# EAGLE board MainBoardSchematic (EAGLE 7.2.0)
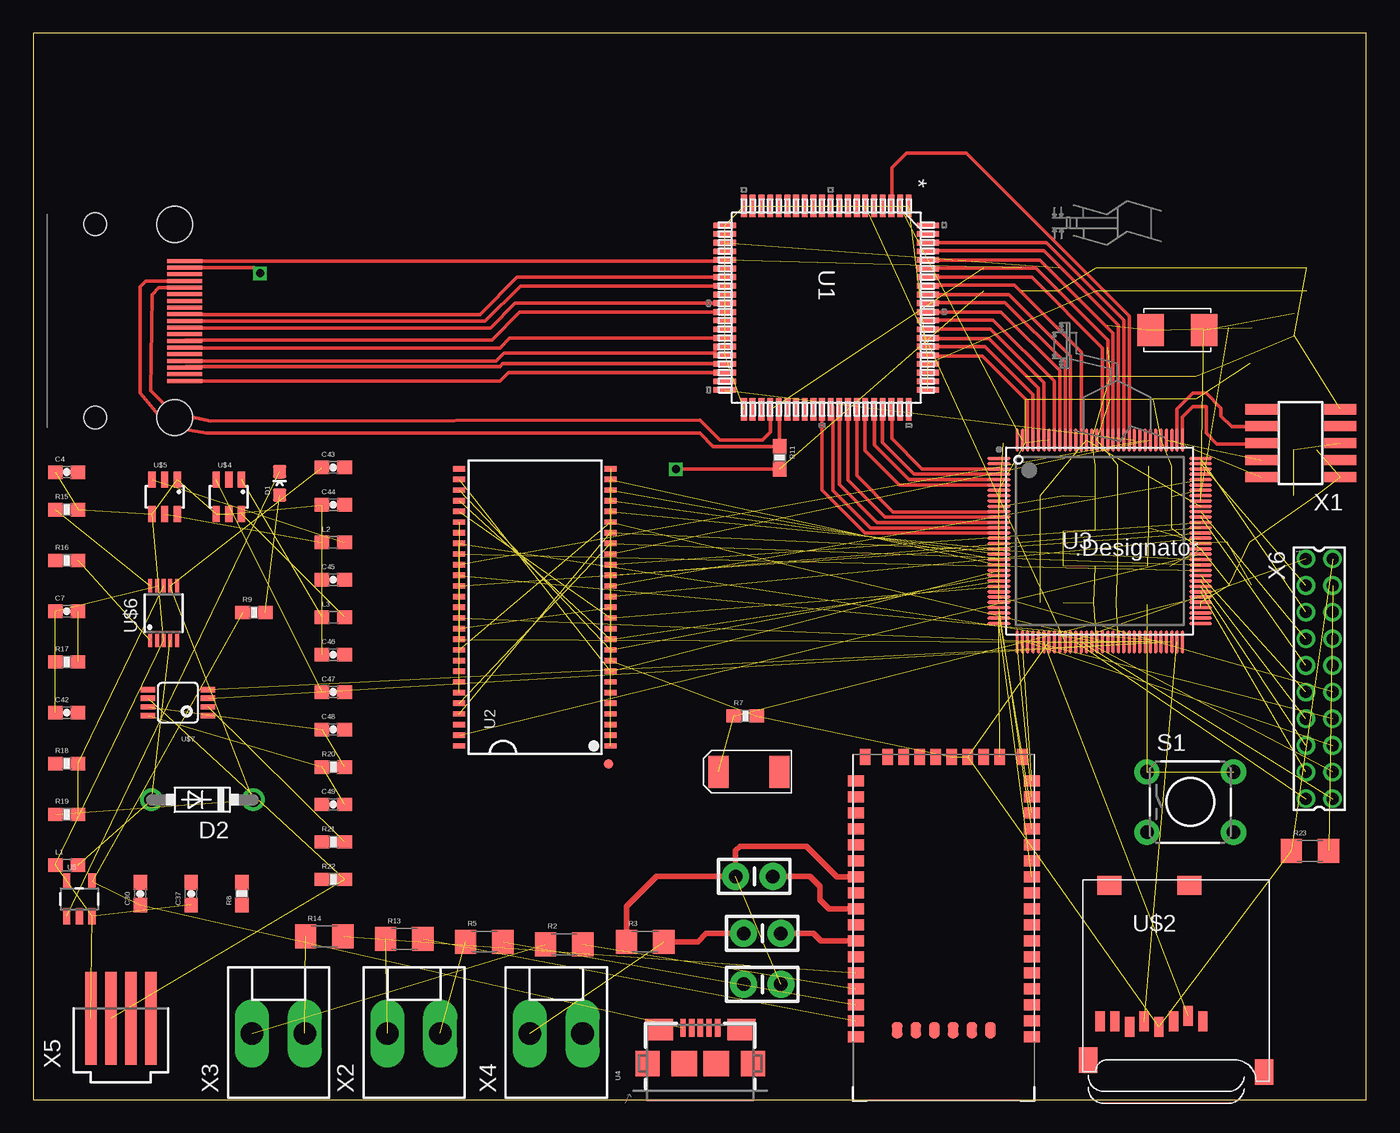
[diagram p0: board, top side]
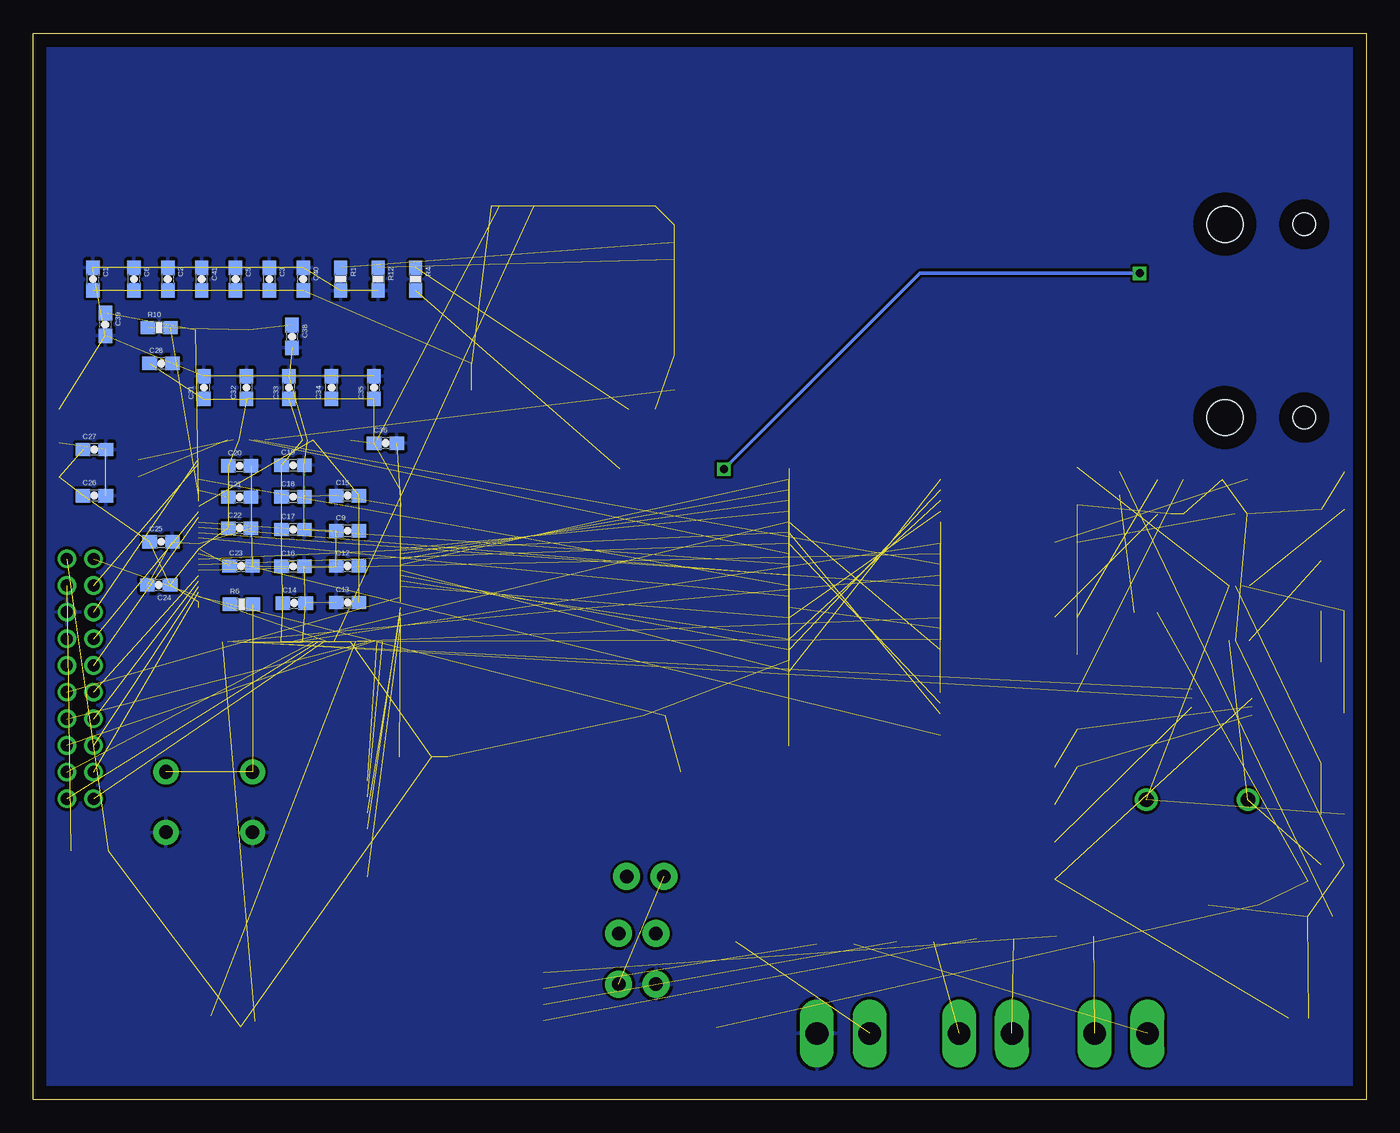
[diagram p1: board, bottom side, seen from below]

Size 100 x 80 mm. Coordinates in mm from the lower left corner, seen from the top.
Outline: 0,0 100,0 100,80 0,80 0,0
Copper layers (1*16): Top 0.035mm / dielectric 1.5mm / Bottom 0.035mm
Design rules "default": minimum track width 10mil, minimum drill 24mil, track to track 8mil, track to pad 8mil, pad to pad 8mil, via to via 8mil, smd to smd 8mil, copper to edge 40mil, drill to drill 8mil, minimum pad ring 10mil, minimum via ring 8mil, stop-mask expansion 4mil, vias tented up to drill 0mil, thermal gap 10mil

## Footprints (pad centres in the part's own frame; a part is rotated, then mirrored left to right if it is on the bottom)
0603-CAP = smd 1.1 x 1: 1 -0.85,0; 2 0.85,0
CAP-PTH-SMALL-KIT = drill 1.016 pad 2.032: 1 -1.397,0; 2 1.397,0
EIA6032 = smd 1.5 x 2.4: P$1 -2.3,0; P$2 2.3,0
LED-0603 = smd 1 x 1: A 0,-0.877; C 0,0.877
DO41-7.6 = drill 1.1 pad 1.7: A 3.81,0; C -3.81,0
0603 = smd 1.1 x 1: 1 -0.85,0; 2 0.85,0
0603-RES = smd 1.1 x 1: 1 -0.85,0; 2 0.85,0
1206 = smd 1.6 x 1.8: 1 -1.4,0; 2 1.4,0
TACTILE-PTH = drill 1.016 pad 1.88: 1 -3.251,2.261; 2 3.251,2.261; 3 -3.251,-2.261; 4 3.251,-2.261
ST_80_2 = smd 1.676 x 0.432: 1 -7.62,6.172; 2 -7.62,5.537; 3 -7.62,4.877; 4 -7.62,4.216; 5 -7.62,3.581; 6 -7.62,2.921; 7 -7.62,2.286; 8 -7.62,1.626; 9 -7.62,0.965; 10 -7.62,0.33; 11 -7.62,-0.33; 12 -7.62,-0.965; 13 -7.62,-1.626; 14 -7.62,-2.286; 15 -7.62,-2.921; 16 -7.62,-3.581; 17 -7.62,-4.216; 18 -7.62,-4.877; 19 -7.62,-5.537; 20 -7.62,-6.172; 41 7.62,-6.172; 42 7.62,-5.537; 43 7.62,-4.877; 44 7.62,-4.216; 45 7.62,-3.581; 46 7.62,-2.921; 47 7.62,-2.286; 48 7.62,-1.626; 49 7.62,-0.965; 50 7.62,-0.33; 51 7.62,0.33; 52 7.62,0.965; 53 7.62,1.626; 54 7.62,2.286; 55 7.62,2.921; 56 7.62,3.581; 57 7.62,4.216; 58 7.62,4.877; 59 7.62,5.537; 60 7.62,6.172 | smd 0.432 x 1.676: 21 -6.172,-7.62; 22 -5.537,-7.62; 23 -4.877,-7.62; 24 -4.216,-7.62; 25 -3.581,-7.62; 26 -2.921,-7.62; 27 -2.286,-7.62; 28 -1.626,-7.62; 29 -0.965,-7.62; 30 -0.33,-7.62; 31 0.33,-7.62; 32 0.965,-7.62; 33 1.626,-7.62; 34 2.286,-7.62; 35 2.921,-7.62; 36 3.581,-7.62; 37 4.216,-7.62; 38 4.877,-7.62; 39 5.537,-7.62; 40 6.172,-7.62; 61 6.172,7.62; 62 5.537,7.62; 63 4.877,7.62; 64 4.216,7.62; 65 3.581,7.62; 66 2.921,7.62; 67 2.286,7.62; 68 1.626,7.62; 69 0.965,7.62; 70 0.33,7.62; 71 -0.33,7.62; 72 -0.965,7.62; 73 -1.626,7.62; 74 -2.286,7.62; 75 -2.921,7.62; 76 -3.581,7.62; 77 -4.216,7.62; 78 -4.877,7.62; 79 -5.537,7.62; 80 -6.172,7.62
TSOP54-400 = smd 0.4 x 0.9: 1 -10.4,-5.68; 2 -9.6,-5.68; 3 -8.8,-5.68; 4 -8,-5.68; 5 -7.2,-5.68; 6 -6.4,-5.68; 7 -5.6,-5.68; 8 -4.8,-5.68; 9 -4,-5.68; 10 -3.2,-5.68; 11 -2.4,-5.68; 12 -1.6,-5.68; 13 -0.8,-5.68; 14 0,-5.68; 15 0.8,-5.68; 16 1.6,-5.68; 17 2.4,-5.68; 18 3.2,-5.68; 19 4,-5.68; 20 4.8,-5.68; 21 5.6,-5.68; 22 6.4,-5.68; 23 7.2,-5.68; 24 8,-5.68; 25 8.8,-5.68; 26 9.6,-5.68; 27 10.4,-5.68; 28 10.4,5.68; 29 9.6,5.68; 30 8.8,5.68; 31 8,5.68; 32 7.2,5.68; 33 6.4,5.68; 34 5.6,5.68; 35 4.8,5.68; 36 4,5.68; 37 3.2,5.68; 38 2.4,5.68; 39 1.6,5.68; 40 0.8,5.68; 41 0,5.68; 42 -0.8,5.68; 43 -1.6,5.68; 44 -2.4,5.68; 45 -3.2,5.68; 46 -4,5.68; 47 -4.8,5.68; 48 -5.6,5.68; 49 -6.4,5.68; 50 -7.2,5.68; 51 -8,5.68; 52 -8.8,5.68; 53 -9.6,5.68; 54 -10.4,5.68 | smd 0.7 x 0.7: P$1 -11.75,-5.5
PDT0128A_N = smd 1.753 x 0.229: 1 -7.569,6.198; 2 -7.569,5.791; 3 -7.569,5.41; 4 -7.569,5.004; 5 -7.569,4.597; 6 -7.569,4.191; 7 -7.569,3.81; 8 -7.569,3.404; 9 -7.569,2.997; 10 -7.569,2.591; 11 -7.569,2.21; 12 -7.569,1.803; 13 -7.569,1.397; 14 -7.569,0.991; 15 -7.569,0.61; 16 -7.569,0.203; 17 -7.569,-0.203; 18 -7.569,-0.61; 19 -7.569,-0.991; 20 -7.569,-1.397; 21 -7.569,-1.803; 22 -7.569,-2.21; 23 -7.569,-2.591; 24 -7.569,-2.997; 25 -7.569,-3.404; 26 -7.569,-3.81; 27 -7.569,-4.191; 28 -7.569,-4.597; 29 -7.569,-5.004; 30 -7.569,-5.41; 31 -7.569,-5.791; 32 -7.569,-6.198; 65 7.569,-6.198; 66 7.569,-5.791; 67 7.569,-5.41; 68 7.569,-5.004; 69 7.569,-4.597; 70 7.569,-4.191; 71 7.569,-3.81; 72 7.569,-3.404; 73 7.569,-2.997; 74 7.569,-2.591; 75 7.569,-2.21; 76 7.569,-1.803; 77 7.569,-1.397; 78 7.569,-0.991; 79 7.569,-0.61; 80 7.569,-0.203; 81 7.569,0.203; 82 7.569,0.61; 83 7.569,0.991; 84 7.569,1.397; 85 7.569,1.803; 86 7.569,2.21; 87 7.569,2.591; 88 7.569,2.997; 89 7.569,3.404; 90 7.569,3.81; 91 7.569,4.191; 92 7.569,4.597; 93 7.569,5.004; 94 7.569,5.41; 95 7.569,5.791; 96 7.569,6.198 | smd 0.229 x 1.753: 33 -6.198,-7.569; 34 -5.791,-7.569; 35 -5.41,-7.569; 36 -5.004,-7.569; 37 -4.597,-7.569; 38 -4.191,-7.569; 39 -3.81,-7.569; 40 -3.404,-7.569; 41 -2.997,-7.569; 42 -2.591,-7.569; 43 -2.21,-7.569; 44 -1.803,-7.569; 45 -1.397,-7.569; 46 -0.991,-7.569; 47 -0.61,-7.569; 48 -0.203,-7.569; 49 0.203,-7.569; 50 0.61,-7.569; 51 0.991,-7.569; 52 1.397,-7.569; 53 1.803,-7.569; 54 2.21,-7.569; 55 2.591,-7.569; 56 2.997,-7.569; 57 3.404,-7.569; 58 3.81,-7.569; 59 4.191,-7.569; 60 4.597,-7.569; 61 5.004,-7.569; 62 5.41,-7.569; 63 5.791,-7.569; 64 6.198,-7.569; 97 6.198,7.569; 98 5.791,7.569; 99 5.41,7.569; 100 5.004,7.569; 101 4.597,7.569; 102 4.191,7.569; 103 3.81,7.569; 104 3.404,7.569; 105 2.997,7.569; 106 2.591,7.569; 107 2.21,7.569; 108 1.803,7.569; 109 1.397,7.569; 110 0.991,7.569; 111 0.61,7.569; 112 0.203,7.569; 113 -0.203,7.569; 114 -0.61,7.569; 115 -0.991,7.569; 116 -1.397,7.569; 117 -1.803,7.569; 118 -2.21,7.569; 119 -2.591,7.569; 120 -2.997,7.569; 121 -3.404,7.569; 122 -3.81,7.569; 123 -4.191,7.569; 124 -4.597,7.569; 125 -5.004,7.569; 126 -5.41,7.569; 127 -5.791,7.569; 128 -6.198,7.569
USB-AB-MICRO-SMD = smd 1.35 x 0.4: D+ 2.675,0; D- 2.675,0.65; GND 2.675,-1.3; ID 2.675,-0.65; VBUS 2.675,1.3 | smd 1.6 x 2.1: P$1 2.55,3.1; P$2 2.55,-3.1 | smd 1.9 x 1.9: P$6 0,1.2; P$7 0,-1.2 | smd 1.9 x 1.801: P$8 0,3.95; P$9 0,-3.95
SOT23-5 = smd 0.55 x 1.2: 1 -0.95,-1.3; 2 0,-1.3; 3 0.95,-1.3; 4 0.95,1.3; 5 -0.95,1.3
RN-52 = smd 1.2 x 0.8: 1 -6.6,8.33; 2 -6.6,7.13; 3 -6.6,5.93; 4 -6.6,4.73; 5 -6.6,3.53; 6 -6.6,2.33; 7 -6.6,1.13; 8 -6.6,-0.07; 9 -6.6,-1.27; 10 -6.6,-2.47; 11 -6.6,-3.67; 12 -6.6,-4.87; 13 -6.6,-6.07; 14 -6.6,-7.27; 15 -6.6,-8.47; 16 -6.6,-9.67; 25 6.6,-9.67; 26 6.6,-8.47; 27 6.6,-7.27; 28 6.6,-6.07; 29 6.6,-4.87; 30 6.6,-3.67; 31 6.6,-2.47; 32 6.6,-1.27; 33 6.6,-0.07; 34 6.6,1.13; 35 6.6,2.33; 36 6.6,3.53; 37 6.6,4.73; 38 6.6,5.93; 39 6.6,7.13; 40 6.6,8.33; G1 -6.6,9.53; G4 6.6,9.53 | smd 0.8 x 1.2: 17 -4.2,-11.47; 18 -3,-11.47; 19 -1.8,-11.47; 20 -0.6,-11.47; 21 0.6,-11.47; 22 1.8,-11.47; 23 3,-11.47; 24 4.2,-11.47; G2 -5.9,-11.47; G3 5.9,-11.46; RFG1 -3.5,9.03; RFG2 -2.1,9.03; RFG3 -0.7,9.03; RFG4 0.7,9.03; RFG5 2.1,9.03; RFG6 3.5,9.03
MICROSD = smd 0.7 x 1.5: 1 9,-10.64; 2 7.9,-10.24; 3 6.8,-10.64; 4 5.7,-11.04; 5 4.6,-10.64; 6 3.5,-11.04; 7 2.4,-10.64; 8 1.3,-10.64 | smd 1.8 x 1.4: CD1 2,-0.44; CD2 8,-0.44 | smd 1.4 x 1.9: MT1 0.4,-13.54; MT2 13.6,-14.44
HDMI_A_SMD = smd 0.3 x 2.6: P$1 4.5,3.74; P$2 4,3.74; P$3 3.5,3.74; P$4 3,3.74; P$5 2.5,3.74; P$6 2,3.74; P$7 1.5,3.74; P$8 1,3.74; P$9 0.5,3.74; P$10 0,3.74; P$11 -0.5,3.74; P$12 -1,3.74; P$13 -1.5,3.74; P$14 -2,3.74; P$15 -2.5,3.74; P$16 -3,3.74; P$17 -3.5,3.74; P$18 -4,3.74; P$19 -4.5,3.74 | hole 2.7: -7.25,2.98; 7.25,2.98 | hole 1.7: -7.25,-2.98; 7.25,-2.98
SOT23-6 = smd 0.55 x 1.2: 1 0.95,1.3; 2 0,1.3; 3 -0.95,1.3; 4 -0.95,-1.3; 5 0,-1.3; 6 0.95,-1.3
MSOP10 = smd 0.3 x 1: 1 -1,-2.05; 2 -0.5,-2.05; 3 0,-2.05; 4 0.5,-2.05; 5 1,-2.05; 6 1,2.05; 7 0.5,2.05; 8 0,2.05; 9 -0.5,2.05; 10 -1,2.05
MSOP8 = smd 0.4 x 1.1: 1 -0.975,-2.25; 2 -0.325,-2.25; 3 0.325,-2.25; 4 0.975,-2.25; 5 0.975,2.25; 6 0.325,2.25; 7 -0.325,2.25; 8 -0.975,2.25
1365-10 = smd 0.76 x 2.4: 1 -2.54,-2.95; 2 -2.54,2.95; 3 -1.27,-2.95; 4 -1.27,2.95; 5 0,-2.95; 6 0,2.95; 7 1.27,-2.95; 8 1.27,2.95; 9 2.54,-2.95; 10 2.54,2.95
KK-156-2 = drill 1.7 pad 2.184 long: 1 -1.98,0; 2 1.98,0
87438-04 = smd 7 x 0.85: 1 0,2.25; 2 0,0.75; 3 0,-0.75; 4 0,-2.25
87758-2016 = drill 0.9 pad 1.27: 1 -9,-1; 2 -9,1; 3 -7,-1; 4 -7,1; 5 -5,-1; 6 -5,1; 7 -3,-1; 8 -3,1; 9 -1,-1; 10 -1,1; 11 1,-1; 12 1,1; 13 3,-1; 14 3,1; 15 5,-1; 16 5,1; 17 7,-1; 18 7,1; 19 9,-1; 20 9,1
NX5032GA = smd 2 x 2.4: P$1 -2,0; P$2 2,0

## Placement (x,y rotation side)
C1  .1uF  [0603-CAP]  95.53,61.56 270 bottom
C2  .1uF  [0603-CAP]  89.91,61.56 270 bottom
C3  .1uF  [0603-CAP]  82.29,61.56 270 bottom
C4  4.7uF  [0603-CAP]  2.51,47.07 0 top
C5  .1uF  [0603-CAP]  84.83,61.56 270 bottom
C6  .1uF  [0603-CAP]  92.45,61.56 270 bottom
C7  470pF  [0603-CAP]  2.51,36.64 0 top
C8  [CAP-PTH-SMALL-KIT]  54.09,16.74 0 top
C9  0.01 uF  [0603-CAP]  76.42,42.67 0 bottom
C10  [CAP-PTH-SMALL-KIT]  54.69,12.46 0 top
C11  [CAP-PTH-SMALL-KIT]  54.69,8.65 0 top
C12  0.1 uF  [0603-CAP]  76.42,40.03 0 bottom
C13  1 uF  [0603-CAP]  76.42,37.29 0 bottom
C14  0.1uF  [0603-CAP]  80.42,37.25 0 bottom
C15  2.2 uF  [0603-CAP]  76.42,45.31 0 bottom
C16  0.1uF  [0603-CAP]  80.52,40.01 0 bottom
C17  0.01uF  [0603-CAP]  80.52,42.77 0 bottom
C18  0.01uF  [0603-CAP]  80.52,45.23 0 bottom
C19  0.1uF  [0603-CAP]  80.52,47.59 0 bottom
C20  0.1uF  [0603-CAP]  84.52,47.55 0 bottom
C21  0.1uF  [0603-CAP]  84.52,45.21 0 bottom
C22  0.1uF  [0603-CAP]  84.52,42.87 0 bottom
C23  0.1uF  [0603-CAP]  84.42,40.03 0 bottom
C24  0.1uF  [0603-CAP]  90.58,38.61 180 bottom
C25  0.1uF  [0603-CAP]  90.42,41.85 0 bottom
C26  0.1uF  [0603-CAP]  95.42,45.31 0 bottom
C27  0.01uF  [0603-CAP]  95.42,48.77 0 bottom
C28  0.1uF  [0603-CAP]  90.42,55.23 0 bottom
C29  10nF  [EIA6032]  53.69,24.59 0 top
C30  4.7uF  [0603-CAP]  8.03,15.45 90 top
C31  2.2 uF  [0603-CAP]  87.2,53.42 90 bottom
C32  2.2 uF  [0603-CAP]  84.01,53.42 90 bottom
C33  2.2 uF  [0603-CAP]  80.82,53.42 90 bottom
C34  2.2 uF  [0603-CAP]  77.63,53.42 90 bottom
C35  2.2 uF  [0603-CAP]  74.44,53.42 90 bottom
C36  2.2 uF  [0603-CAP]  73.58,49.25 0 bottom
C37  4.7uF  [0603-CAP]  11.84,15.45 90 top
C38  12pF  [0603-CAP]  80.59,57.26 270 bottom
C39  12pF  [0603-CAP]  94.6,58.16 270 bottom
C40  .1uF  [0603-CAP]  79.75,61.56 270 bottom
C41  .1uF  [0603-CAP]  87.37,61.56 270 bottom
C42  4.7pF  [0603-CAP]  2.51,29.02 0 top
C43  22uF  [0603-CAP]  22.51,47.43 0 top
C44  4.7uF  [0603-CAP]  22.51,44.62 0 top
C45  4.7uF  [0603-CAP]  22.51,39 0 top
C46  2.2uF  [0603-CAP]  22.51,33.38 0 top
C47  10uF  [0603-CAP]  22.51,30.57 0 top
C48  1uF  [0603-CAP]  22.51,27.76 0 top
C49  220nF  [0603-CAP]  22.51,22.14 0 top
D1  RED  [LED-0603]  18.48,46.23 0 top
D2  1N5817-T  [DO41-7.6]  12.68,22.49 180 top
L1  10uH  [0603]  2.51,17.59 0 top
L2  4.7uH  [0603]  22.51,41.81 0 top
L3  10uH  [0603]  22.51,36.19 0 top
R1  887  [0603-RES]  76.94,61.56 270 bottom
R2  8  [1206]  39.83,11.66 0 top
R3  2.2K  [1206]  45.9,11.85 0 top
R4  2k  [0603-RES]  71.32,61.56 270 bottom
R5  8  [1206]  33.83,11.85 0 top
R6  470  [0603-RES]  84.38,37.16 0 bottom
R7  10k  [0603-RES]  53.42,28.78 0 top
R8  10k  [0603-RES]  15.65,15.45 90 top
R9  10k  [0603-RES]  16.56,36.54 0 top
R10  750  [0603-RES]  90.56,57.92 0 bottom
R11  2k  [0603-RES]  55.99,48.16 270 top
R12  10k  [0603-RES]  74.13,61.56 270 bottom
R13  8  [1206]  27.83,12.04 0 top
R14  8  [1206]  21.83,12.23 0 top
R15  1M  [0603-RES]  2.51,44.26 0 top
R16  30k  [0603-RES]  2.51,40.45 0 top
R17  82k  [0603-RES]  2.51,32.83 0 top
R18  549k  [0603-RES]  2.51,25.21 0 top
R19  1.65M  [0603-RES]  2.51,21.4 0 top
R20  1k  [0603-RES]  22.51,24.95 0 top
R21  200k  [0603-RES]  22.51,19.33 0 top
R22  33m  [0603-RES]  22.51,16.52 0 top
R23  8  [1206]  95.78,18.64 0 top
S1  [TACTILE-PTH]  86.8,22.32 0 top
U1  AD9389BBSTZ-165  [ST_80_2]  59.5,59.42 270 top
U2  [TSOP54-400]  37.64,36.93 90 top
U3  Value  [PDT0128A_N]  80.01,41.91 0 top
U4  [USB-AB-MICRO-SMD]  50.04,2.71 90 top
U5  MCP73831  [SOT23-5]  3.45,15.05 0 top
U$1  BLUETOOTH-RN-52  [RN-52]  68.31,14.24 180 top
U$2  MICROSD  [MICROSD]  78.74,16.51 0 top
U$3  HDMI_A  [HDMI_A_SMD]  7.62,58.42 270 top
U$4  LTC3531  [SOT23-6]  14.67,45.23 0 top
U$5  LTC3405A  [SOT23-6]  9.86,45.23 0 top
U$6  LTC3401  [MSOP10]  9.78,36.5 0 top
U$7  STC3100  [MSOP8]  10.85,29.78 90 top
X1  1365-10  [1365-10]  95.09,49.25 90 top
X2  [KK-156-2]  28.55,4.96 0 top
X3  [KK-156-2]  18.39,4.96 0 top
X4  [KK-156-2]  39.23,4.96 0 top
X5  87438-04  [87438-04]  6.57,6.1 90 top
X6  87758-2016  [87758-2016]  96.48,31.57 270 top
Y1  [NX5032GA]  85.83,57.73 0 top

## Library data of the parts
C1-C7 C9 C12-C49 L1-L3 R1-R23 = SparkFun-Passives
C8 C10 C11 = SparkFun-Capacitors; PROD_ID: CAP-08370
D1 = HelmetHUD; PROD_ID: DIO-00819
D2 = diode
S1 = SparkFun-Retired
U1 U2 U4 U$1-U$7 Y1 = HelmetHUD
U3 = HelmetHUD; ALTERNATEPARTNUMBER: TM4C129ENCPDTI3; APPLICATION_BUILDNUMBER: *; COMPTYPE: IC; MANUFACTURER: Texas Instruments; MOUNTTYPE: SMT; PACKAGEREFERENCE: PDT0128A; PARTNUMBER: TM4C129ENCPDTI3R; PIN_COUNT: 128; REFDES: RefDes; ROHS: Y; TYPE: TYPE
U5 = SparkFun-PowerIC; PROD_ID: IC-09995
X1 = HelmetHUD; OC_FARNELL: unknown; OC_NEWARK: unknown
X2-X5 = con-molex; OC_FARNELL: unknown; OC_NEWARK: unknown
X6 = HelmetHUD; MPN: 87758-2016; OC_FARNELL: 7472374; OC_NEWARK: 25M5677

## Nets
1.8V: C1.2 C2.2 C3.2 C5.2 C6.2 C40.2 C41.2 U1.1 U1.16 U1.19 U1.20 U1.21 U1.24 U1.29 U1.36 U1.41 U1.61 U1.62 U1.63 U1.64
3.3V: C14.1 C16.1 C17.1 C18.1 C19.1 C20.1 C21.1 C22.1 C23.1 C24.1 C25.1 C26.1 C27.1 C28.1 C31.1 C32.1 C33.1 C34.1 C35.1 C36.1 R7.2 R23.1 U2.1 U2.3 U2.9 U2.14 U2.27 U2.43 U2.49 U3.7 U3.8 U3.9 U3.16 U3.26 U3.28 U3.39 U3.47 U3.51 U3.52 U3.68 U3.69 U3.79 U3.90 U3.101 U3.113 U3.122 U$1.19 U$1.20 U$2.4 X1.1 X6.2
5V: R4.2 R11.2 U$3.P$18
BT_GPIO7: U3.31 U$1.17
BT_GPIO9: U3.32 U$1.10
BT_UART_CTS: U3.30 U$1.14
BT_UART_RTS: U3.29 U$1.13
BT_UART_RX: U3.34 U$1.16
BT_UART_TX: U3.33 U$1.15
CAM_CLK: U3.43 X6.1
CAM_D0: U3.73 X6.13
CAM_D1: U3.72 X6.15
CAM_D2: U3.71 X6.17
CAM_D3: U3.44 X6.19
CAM_D4: U3.45 X6.20
CAM_D5: U3.46 X6.18
CAM_D6: U3.35 X6.16
CAM_D7: U3.36 X6.14
CAM_HSYNC: U3.85 X6.9
CAM_PCLK: U3.74 X6.11
CAM_PWDWN: U3.27 X6.12
CAM_SCL: U3.95 X6.3
CAM_SDA: U3.96 X6.5
CAM_VSYNC: U3.86 X6.7
DDCSCL: R4.1 U1.44 U$3.P$15
DDCSDA: R11.1 U1.45 U$3.P$16
GAUGE_SCL: U3.61 U$7.4
GAUGE_SDA: U3.60 U$7.3
GND: C1.1 C2.1 C3.1 C4.2 C5.1 C6.1 C9.1 C11.1 C12.1 C13.1 C14.2 C15.1 C16.2 C17.2 C18.2 C19.2 C20.2 C21.2 C22.2 C23.2 C24.2 C25.2 C26.2 C27.2 C28.2 C29.P$2 C30.2 C31.2 C32.2 C33.2 C34.2 C35.2 C36.2 C37.2 C38.2 C39.2 C40.1 C41.1 C42.2 C43.2 C44.2 C45.2 C46.2 C47.2 C48.2 C49.1 R1.2 R8.1 R12.2 R16.1 R17.1 R18.1 R21.1 R22.1 S1.3 S1.4 U1.7 U1.8 U1.9 U1.10 U1.11 U1.12 U1.13 U1.14 U1.15 U1.17 U1.18 U1.22 U1.26 U1.32 U1.39 U1.42 U1.43 U1.59 U1.60 U1.79 U1.80 U2.6 U2.12 U2.28 U2.41 U2.46 U2.52 U2.54 U3.10 U3.17 U3.48 U3.55 U3.58 U3.80 U3.114 U4.GND U5.2 U$1.36 U$1.G1 U$1.G2 U$1.G3 U$1.G4 U$1.RFG1 U$1.RFG2 U$1.RFG3 U$1.RFG4 U$1.RFG5 U$1.RFG6 U$2.6 U$2.MT1 U$2.MT2 U$3.P$2 U$3.P$5 U$3.P$8 U$3.P$12 U$3.P$17 U$4.2 U$5.2 U$5.6 U$6.5 U$7.5 X1.3 X1.5 X1.9 X4.2 X6.6
HDMI_CLK: U1.6 U3.42
HDMI_D0: U1.2 U3.127
HDMI_D1: U1.78 U3.108
HDMI_D2: U1.77 U3.109
HDMI_D3: U1.76 U3.110
HDMI_D4: U1.75 U3.111
HDMI_D5: U1.74 U3.112
HDMI_D6: U1.73 U3.116
HDMI_D7: U1.72 U3.118
HDMI_D8: U1.71 U3.119
HDMI_D9: U1.70 U3.120
HDMI_D10: U1.69 U3.121
HDMI_D11: U1.68 U3.123
HDMI_D12: U1.67 U3.124
HDMI_D13: U1.66 U3.125
HDMI_D14: U1.65 U3.126
HDMI_D15: U1.58 U3.3
HDMI_D16: U1.57 U3.4
HDMI_D17: U1.56 U3.5
HDMI_D18: U1.55 U3.6
HDMI_D19: U1.54 U3.11
HDMI_D20: U1.53 U3.12
HDMI_D21: U1.52 U3.13
HDMI_D22: U1.51 U3.14
HDMI_D23: U1.50 U3.15
HDMI_DE: U1.3 U3.107
HDMI_HSYNC: U3.128
HDMI_INT: U1.40 U3.106
HDMI_VSYNC: U3.1
N$1: R12.1 U1.25 U$3.P$19
N$2: R1.1 U1.23
N$3: U1.34 U$3.P$6
N$4: U1.30 U$3.P$9
N$5: U1.31 U$3.P$7
N$6: U1.35 U$3.P$4
N$7: U1.37 U$3.P$3
N$8: C8.2 U$1.33
N$9: U1.38 U$3.P$1
N$10: U1.28 U$3.P$10
N$11: C10.2 U$1.35
N$12: C8.1 C11.2 R3.1 U$1.31
N$13: C10.1 R3.2 X4.1
N$14: R6.2 S1.1 S1.2
N$15: R13.2 U$1.40
N$16: R5.2 U$1.39
N$17: R2.2 U$1.38
N$18: R14.2 U$1.37
N$19: R23.2 X6.4
N$20: U1.27 U$3.P$11
N$21: C30.1 R9.1 U4.VBUS U5.4
N$22: C4.1 C37.1 C44.1 C46.1 L1.1 R15.2 U5.3 U$4.4 U$4.5 U$5.1 U$5.4 U$6.3 X5.1
N$23: C9.2 C12.2 C13.2 C15.2 U3.87 U3.115
N$24: C29.P$1 R6.1 R7.1 U3.70
N$25: C38.1 R10.1 Y1.P$1
N$26: U5.5
N$27: C39.1 U3.88 Y1.P$2
N$28: R8.2
N$29: R10.2 U3.89
N$30: R14.1 X3.2
N$31: R2.1 X3.1
N$32: R5.1 X2.2
N$33: R13.1 X2.1
N$34: D1.A R9.2
N$35: D1.C U5.1
N$36: R15.1 U$6.10
N$37: R16.2 U$6.1
N$38: C7.1 C42.1 U$6.9
N$39: C7.2 R17.2
N$40: R18.2 R19.2 U$6.8
N$41: C43.1 D2.C R19.1 U$6.7
N$42: D2.A L1.2 U$6.4
N$43: C45.1 L2.1 U$5.5
N$44: L2.2 U$5.3
N$45: L3.2 U$4.6
N$46: L3.1 U$4.1
N$47: C47.1 U$4.3
N$48: C48.1 R20.2 U$7.7
N$49: C49.2 R20.1 U$7.8
N$50: R21.2 U$7.2
N$51: R22.2 U$7.6 X5.2
N$52: U3.63 U$2.5
N$65: X6.8
N$66: X6.10
SD_CS: U3.38 U$2.2
SD_DIN: U$2.3
SD_IN: U3.37
SDRAM_0: U2.2 U2.23 U3.18
SDRAM_1: U2.4 U2.24 U3.19
SDRAM_2: U2.5 U2.25 U3.20
SDRAM_3: U2.7 U2.26 U3.21
SDRAM_4: U2.8 U2.29 U3.22
SDRAM_5: U2.10 U2.30 U3.23
SDRAM_6: U2.11 U2.31 U3.24
SDRAM_7: U2.13 U2.32 U3.25
SDRAM_8: U2.33 U2.42 U3.40
SDRAM_9: U2.34 U2.44 U3.41
SDRAM_10: U2.22 U2.45 U3.50
SDRAM_11: U2.35 U2.47 U3.49
SDRAM_12: U2.36 U2.48 U3.75
SDRAM_13: U2.20 U2.50 U3.76
SDRAM_14: U2.21 U2.51 U3.77
SDRAM_15: U2.53 U3.78
SDRAM_CAS: U2.17 U3.83
SDRAM_CKE: U2.37 U3.104
SDRAM_CLK: U2.38 U3.62
SDRAM_CS: U2.19 U3.103
SDRAM_LDQM: U2.15 U3.81
SDRAM_RAS: U2.18 U3.84
SDRAM_UDQM: U2.39 U3.82
SDRAM_WE: U2.16 U3.92
SWCLK: U3.100 X1.4
TDI: U3.98 X1.8
TDO_SWO: U3.97 X1.6
TMS_SWDIO: U3.99 X1.2

## Tracks (layer width: path | path; a pad name or v marks a point on that pad's centre or on a via)
1.8V  (19 unrouted)
3.3V  (50 unrouted)
5V  (via drill 0.6)  (1 unrouted)
  Top 0.254: U$3.P$18 16.58,62.42 v17,62 | v48.2,47.3 R11.2
  Bottom 0.254: v17,62 33.5,62 v48.2,47.3
BT_GPIO7  (1 unrouted)
BT_GPIO9  (1 unrouted)
BT_UART_CTS  (1 unrouted)
BT_UART_RTS  (1 unrouted)
BT_UART_RX  (1 unrouted)
BT_UART_TX  (1 unrouted)
CAM_CLK  (1 unrouted)
CAM_D0  (1 unrouted)
CAM_D1  (1 unrouted)
CAM_D2  (1 unrouted)
CAM_D3  (1 unrouted)
CAM_D4  (1 unrouted)
CAM_D5  (1 unrouted)
CAM_D6  (1 unrouted)
CAM_D7  (1 unrouted)
CAM_HSYNC  (1 unrouted)
CAM_PCLK  (1 unrouted)
CAM_PWDWN  (1 unrouted)
CAM_SCL  (1 unrouted)
CAM_SDA  (1 unrouted)
CAM_VSYNC  (1 unrouted)
DDCSCL  (1 unrouted)
  Top 0.254: U$3.P$15 9.42,60.92 8.9,60.4 8.8,53.2 10.5,51.5 13.3,50.9 50,51 51.5,49.5 54.7,49.5 55.3,50.1 55.3,51.78 U1.44
DDCSDA
  Top 0.254: U$3.P$16 8.42,61.42 8,61 8,53 10.1,50.5 13,50 50,50 51,49 56.08,49 R11.1 55.99,51.73 U1.45 | U1.45 | 56.09,51.63 U1.45
GAUGE_SCL  (1 unrouted)
GAUGE_SDA  (1 unrouted)
GND  (42 unrouted)
  pour Bottom: 0,0 0,80 100,80 100,0
HDMI_CLK  (1 unrouted)
HDMI_D0  (1 unrouted)
HDMI_D1
  Top 0.254: U3.108 81.81,58.49 76,64.3 U1.78
HDMI_D2
  Top 0.254: U3.109 81.41,58.09 75.8,63.7 67.18,63.7 U1.77
HDMI_D3
  Top 0.254: U3.110 81,57.5 75.5,63 U1.76
HDMI_D4
  Top 0.254: U3.111 80.62,56.98 75.2,62.4 67.18,62.4 U1.75
HDMI_D5
  Top 0.254: U3.112 80.21,56.39 74.9,61.7 U1.74
HDMI_D6
  Top 0.254: U3.116 78.61,56.09 73.6,61.1 67.17,61.1 U1.73
HDMI_D7
  Top 0.254: U3.118 77.8,55.8 73.2,60.4 67.14,60.4 U1.72
HDMI_D8
  Top 0.254: U3.119 77.42,55.28 72.9,59.8 67.17,59.8 U1.71
HDMI_D9
  Top 0.254: U3.120 77.01,54.69 72.6,59.1 U1.70
HDMI_D10
  Top 0.254: U3.121 76.61,53.89 72,58.5 67.17,58.5 U1.69
HDMI_D11
  Top 0.254: U3.123 75.82,53.78 71.8,57.8 U1.68
HDMI_D12
  Top 0.254: U3.124 75.41,53.39 71.7,57.1 67.15,57.1 U1.67
HDMI_D13
  Top 0.254: U3.125 75.01,52.89 71.4,56.5 U1.66
HDMI_D14
  Top 0.254: U3.126 74.6,52.4 71.2,55.8 67.16,55.8 U1.65
HDMI_D15
  Top 0.254: U3.3 66.68,47.32 64.4,49.6 64.4,51.78 U1.58
HDMI_D16
  Top 0.254: U3.4 66.09,46.91 63.7,49.3 63.7,51.78 U1.57
HDMI_D17
  Top 0.254: U3.5 65.69,46.51 63.1,49.1 63.1,51.78 U1.56
HDMI_D18
  Top 0.254: U3.6 65,46.1 62.4,48.7 62.4,51.78 U1.55
HDMI_D19
  Top 0.254: U1.54 61.79,46.81 64.5,44.1 72.42,44.1 U3.11
HDMI_D20
  Top 0.254: U1.53 61.13,46.47 63.9,43.7 72.43,43.7 U3.12
HDMI_D21
  Top 0.254: U1.52 60.47,46.13 63.3,43.3 U3.13
HDMI_D22
  Top 0.254: U1.51 59.83,51.83 60,52 60,45.7 62.8,42.9 U3.14
HDMI_D23
  Top 0.254: U1.50 59.17,45.73 62.4,42.5 72.42,42.5 U3.15
HDMI_DE
  Top 0.254: U3.107 82.22,58.78 70,71 65.5,71 64.4,69.9 64.4,67.06 U1.3
HDMI_INT  (1 unrouted)
N$1  (1 unrouted)
  Top 0.254: U$3.P$19 51.8,62.92 U1.25
N$2  (1 unrouted)
N$3
  Top 0.254: U1.34 35.73,57.13 35,56.4 11.38,56.4 U$3.P$6
N$4
  Top 0.254: U1.30 36.15,59.75 34.3,57.9 11.38,57.9 U$3.P$9
N$5
  Top 0.254: U1.31 36.49,59.09 34.4,57 11.44,57 U$3.P$7
N$6
  Top 0.254: U1.35 51.5,56.5 51,56 35.3,56 34.7,55.4 11.38,55.4 U$3.P$4
N$7
  Top 0.254: U1.37 35.2,55.2 35,55 11.44,55 U$3.P$3
N$8
  Top 0.406: C8.2 58.26,16.74 59,16 59,15 59.69,14.31 U$1.33
N$9
  Top 0.254: U1.38 35.64,54.54 35,53.9 11.38,53.9 U$3.P$1
N$10
  Top 0.254: U1.28 36.55,61.05 33.9,58.4 11.38,58.4 U$3.P$10
N$11
  Top 0.406: C10.2 58.54,12.46 59.09,11.91 U$1.35
N$12  (1 unrouted)
  Top 0.406: U$1.31 60.29,16.71 58,19 53,19 52.69,18.69 C8.1 46.74,16.74 44.5,14.5 R3.1
N$13  (1 unrouted)
  Top 0.406: C10.1 50.46,12.46 49.85,11.85 R3.2
N$14  (2 unrouted)
N$15  (1 unrouted)
N$16  (1 unrouted)
N$17  (1 unrouted)
N$18  (1 unrouted)
N$19  (1 unrouted)
N$20
  Top 0.254: U1.27 36.31,61.71 33.5,58.9 11.38,58.9 U$3.P$11
N$21  (3 unrouted)
N$22  (12 unrouted)
N$23  (5 unrouted)
N$24  (3 unrouted)
N$25  (2 unrouted)
N$27  (2 unrouted)
N$29  (1 unrouted)
N$30  (1 unrouted)
N$31  (1 unrouted)
N$32  (1 unrouted)
N$33  (1 unrouted)
N$34  (1 unrouted)
N$35  (1 unrouted)
N$36  (1 unrouted)
N$37  (1 unrouted)
N$38  (2 unrouted)
N$39  (1 unrouted)
N$40  (2 unrouted)
N$41  (3 unrouted)
N$42  (2 unrouted)
N$43  (2 unrouted)
N$44  (1 unrouted)
N$45  (1 unrouted)
N$46  (1 unrouted)
N$47  (1 unrouted)
N$48  (2 unrouted)
N$49  (2 unrouted)
N$50  (1 unrouted)
N$51  (2 unrouted)
N$52  (1 unrouted)
N$53  (via drill 0.6)
  other vias: 17,62
SD_CS  (1 unrouted)
SDRAM_0  (2 unrouted)
SDRAM_1  (2 unrouted)
SDRAM_2  (2 unrouted)
SDRAM_3  (2 unrouted)
SDRAM_4  (2 unrouted)
SDRAM_5  (2 unrouted)
SDRAM_6  (2 unrouted)
SDRAM_7  (2 unrouted)
SDRAM_8  (2 unrouted)
SDRAM_9  (2 unrouted)
SDRAM_10  (2 unrouted)
SDRAM_11  (2 unrouted)
SDRAM_12  (2 unrouted)
SDRAM_13  (2 unrouted)
SDRAM_14  (2 unrouted)
SDRAM_15  (1 unrouted)
SDRAM_CAS  (1 unrouted)
SDRAM_CKE  (1 unrouted)
SDRAM_CLK  (1 unrouted)
SDRAM_CS  (1 unrouted)
SDRAM_LDQM  (1 unrouted)
SDRAM_RAS  (1 unrouted)
SDRAM_UDQM  (1 unrouted)
SDRAM_WE  (1 unrouted)
SWCLK  (1 unrouted)
TDI
  Top 0.254: U3.98 85.8,51.8 87,53 88,53 89.1,51.9 89.1,51.3 89.9,50.5 92.12,50.5 X1.8
TDO_SWO
  Top 0.254: U3.97 86.21,51.21 87,52 88,52 88,50 88.8,49.2 92.09,49.2 X1.6
TMS_SWDIO  (1 unrouted)